# EAGLE board bmp_entropia (EAGLE 6.4)
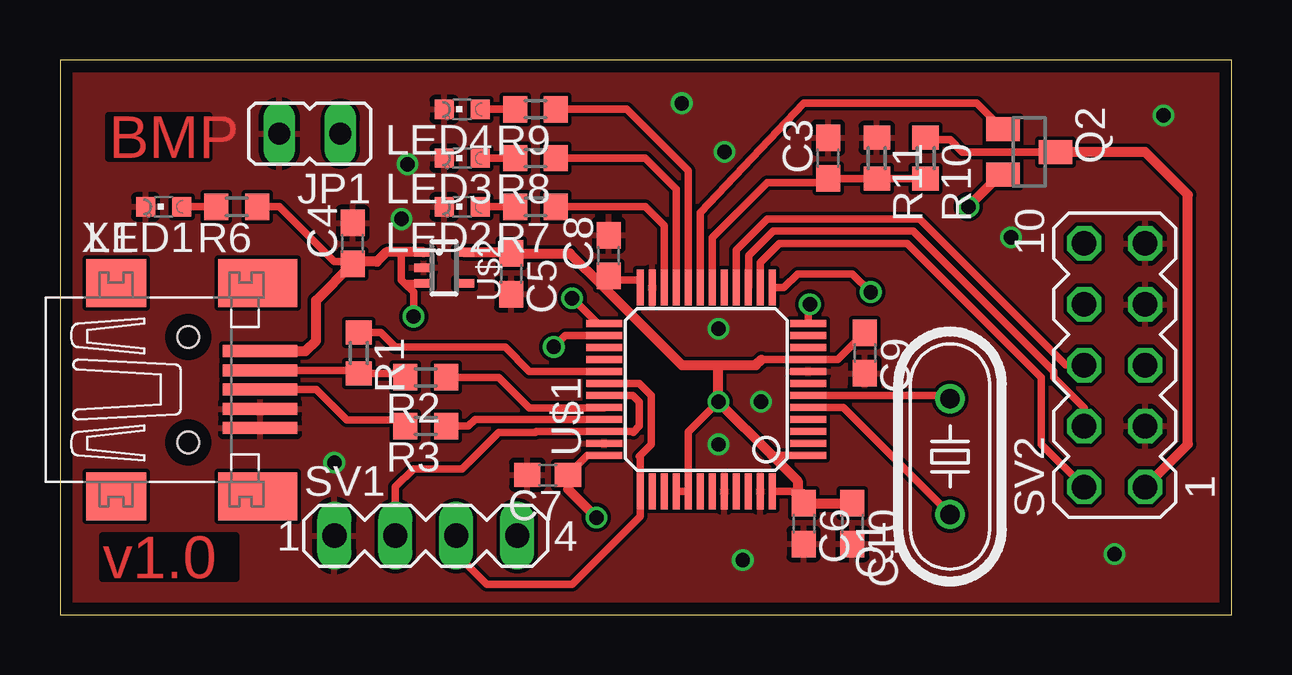
[diagram p0: board, top side]
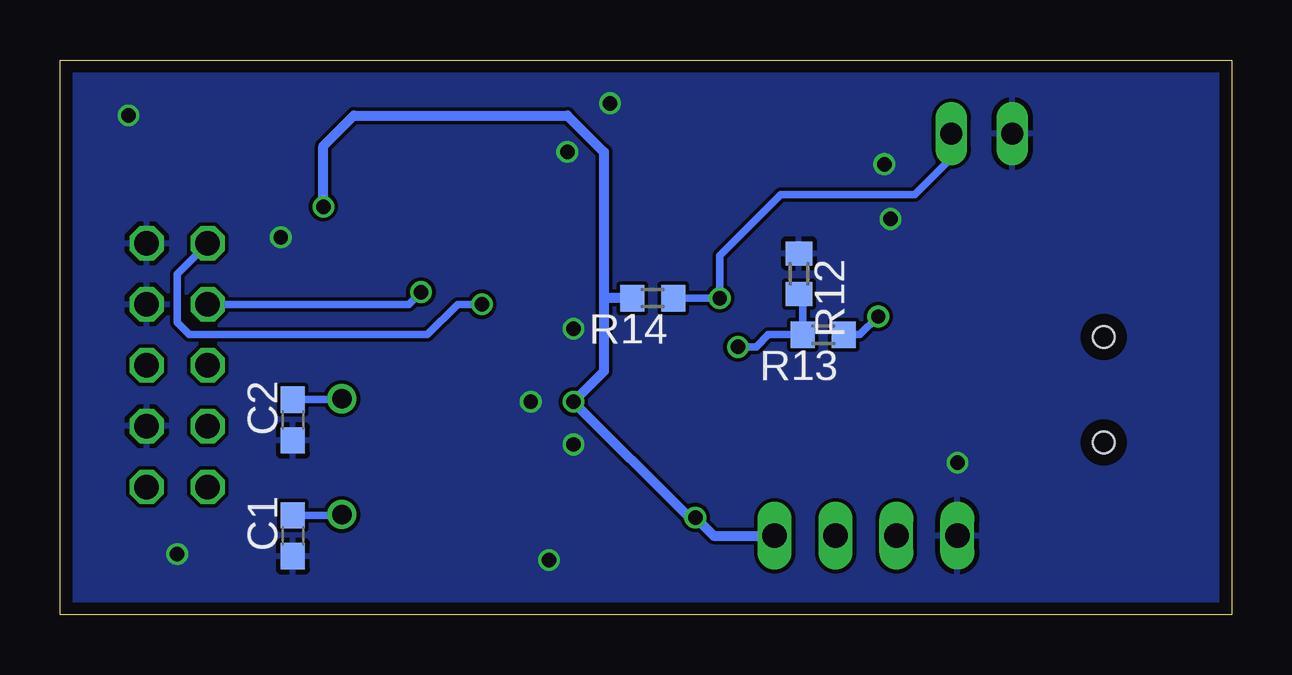
[diagram p1: board, bottom side, seen from below]

Size 48.82 x 23.14 mm. Coordinates in mm from the lower left corner, seen from the top.
Outline: 0,0 48.82,0 48.82,23.14 0,23.14 0,0
Copper layers (1*16): Top 0.035mm / dielectric 1.5mm / Bottom 0.035mm
Design rules "Eagle-DRU - 1203 - LeitOn - 01 and 02 layers": minimum track width 6mil, minimum drill 0.3mm, track to track 6mil, track to pad 6mil, pad to pad 6mil, via to via 6mil, smd to smd 6mil, copper to edge 20mil, drill to drill 10mil, minimum pad ring 8mil, minimum via ring 6mil, stop-mask expansion 3mil, vias tented up to drill 0mil, thermal gap 8mil

## Footprints (pad centres in the part's own frame; a part is rotated, then mirrored left to right if it is on the bottom)
C0603 = smd 1.1 x 1: 1 -0.85,0; 2 0.85,0
JP1 = drill 0.914 long: 1 0,-1.27; 2 0,1.27
CHIPLED_0603 = smd 0.8 x 0.8: A 0,-0.75; C 0,0.75
HC49/S = drill 0.813: 1 -2.413,0; 2 2.413,0
SOT23 = smd 1 x 1.4: 1 -0.95,-1.1; 2 0.95,-1.1; 3 0,1.1
R0603 = smd 1 x 1.1: 1 -0.85,0; 2 0.85,0
MA04-1 = drill 1.016 long: 1 -3.81,0; 2 -1.27,0; 3 1.27,0; 4 3.81,0
MA05-2 = drill 1.016 octagon: 1 -5.08,-1.27; 2 -5.08,1.27; 3 -2.54,-1.27; 4 -2.54,1.27; 5 0,-1.27; 6 0,1.27; 7 2.54,-1.27; 8 2.54,1.27; 9 5.08,-1.27; 10 5.08,1.27
TQFP48 = smd 0.3 x 1.5: 1 -2.75,-4.25; 2 -2.25,-4.25; 3 -1.75,-4.25; 4 -1.25,-4.25; 5 -0.75,-4.25; 6 -0.25,-4.25; 7 0.25,-4.25; 8 0.75,-4.25; 9 1.25,-4.25; 10 1.75,-4.25; 11 2.25,-4.25; 12 2.75,-4.25; 25 2.75,4.25; 26 2.25,4.25; 27 1.75,4.25; 28 1.25,4.25; 29 0.75,4.25; 30 0.25,4.25; 31 -0.25,4.25; 32 -0.75,4.25; 33 -1.25,4.25; 34 -1.75,4.25; 35 -2.25,4.25; 36 -2.75,4.25 | smd 1.5 x 0.3: 13 4.25,-2.75; 14 4.25,-2.25; 15 4.25,-1.75; 16 4.25,-1.25; 17 4.25,-0.75; 18 4.25,-0.25; 19 4.25,0.25; 20 4.25,0.75; 21 4.25,1.25; 22 4.25,1.75; 23 4.25,2.25; 24 4.25,2.75; 37 -4.25,2.75; 38 -4.25,2.25; 39 -4.25,1.75; 40 -4.25,1.25; 41 -4.25,0.75; 42 -4.25,0.25; 43 -4.25,-0.25; 44 -4.25,-0.75; 45 -4.25,-1.25; 46 -4.25,-1.75; 47 -4.25,-2.25; 48 -4.25,-2.75
SC70-5L = smd 0.35 x 0.8: 1 -0.65,-0.85; 2 0,-0.85; 3 0.65,-0.85; 4 0.65,0.85; 5 -0.65,0.85
32005-301 = smd 3.1 x 0.5: 1 3,1.6; 2 3,0.8; 3 3,0; 4 3,-0.8; 5 3,-1.6 | smd 2.5 x 2: M1 -3,-4.45; M2 -3,4.45 | smd 3.3 x 2: M3 2.9,4.45; M4 2.9,-4.45 | hole 0.9: 0,2.2; 0,-2.2

## Placement (x,y rotation side)
C1  27p  [C0603]  39.12,3.3 90 bottom
C2  27p  [C0603]  39.12,8.13 90 bottom
C3  100n  [C0603]  32,19.05 90 top
C4  1u  [C0603]  12.19,15.49 90 top
C5  2u2  [C0603]  18.8,14.22 270 top
C6  100n  [C0603]  30.99,3.81 270 top
C7  100n  [C0603]  20.32,5.84 180 top
C8  100n  [C0603]  22.86,14.99 90 top
C9  100n  [C0603]  33.53,10.92 270 top
C10  2u2  [C0603]  33.02,3.81 270 top
JP1  [JP1]  10.41,20.07 90 top
LED1  green  [CHIPLED_0603]  4.32,17.02 90 top
LED2  red  [CHIPLED_0603]  16.76,17.02 90 top
LED3  yellow  [CHIPLED_0603]  16.76,19.05 90 top
LED4  yellow  [CHIPLED_0603]  16.76,21.08 90 top
Q1  8MHz  [HC49/S]  37.08,6.6 90 top
Q2  IRLML5103  [SOT23]  40.39,19.3 270 top
R1  1k5  [R0603]  12.45,10.92 270 top
R2  22R  [R0603]  15.24,9.91 180 top
R3  22R  [R0603]  15.24,7.87 180 top
R6  470R  [R0603]  7.37,17.02 180 top
R7  470R  [R0603]  19.81,17.02 180 top
R8  470R  [R0603]  19.81,19.05 180 top
R9  470R  [R0603]  19.81,21.08 180 top
R10  4k7  [R0603]  36.07,19.05 270 top
R11  10k  [R0603]  34.04,19.05 270 top
R12  10k  [R0603]  18.03,14.22 270 bottom
R13  4k7  [R0603]  17.02,11.68 180 bottom
R14  10k  [R0603]  24.13,13.21 180 bottom
SV1  [MA04-1]  15.24,3.3 0 top
SV2  [MA05-2]  43.94,10.41 90 top
U$1  STM32F_48PIN  [TQFP48]  26.92,9.4 90 top
U$2  TLV70033DCK  [SC70-5L]  16,14.48 270 top
X1  MINI-USB-32005-301  [32005-301]  5.33,9.4 0 top

## Library data of the parts
C1-C10 R1-R3 R6-R14 = rcl
JP1 = jumper
LED1-LED4 = led
Q1 = crystal; OC_FARNELL: 1667008; OC_NEWARK: unknown
Q2 = transistor-small-signal
SV1 SV2 = con-lstb; OC_FARNELL: unknown; OC_NEWARK: unknown
U$1 = stm32f
U$2 = tlv700
X1 = con-cypressindustries; OC_FARNELL: unknown; OC_NEWARK: unknown

## Nets
+3V3: C5.1 C6.1 C7.1 C8.1 C9.1 C10.1 Q2.2 R14.2 SV1.4 U$1.1 U$1.9 U$1.24 U$1.36 U$1.40 U$1.41 U$1.48 U$2.5
+5V: C4.1 R6.1 R13.1 U$2.1 U$2.3 X1.1
D+: R3.2 X1.3
D-: R1.2 R2.2 X1.2
GND: C1.1 C2.1 C3.2 C4.2 C5.2 C6.2 C7.2 C8.2 C9.2 C10.2 JP1.2 LED1.C LED2.C LED3.C LED4.C R11.1 R12.1 SV1.1 SV2.3 SV2.7 SV2.9 U$1.8 U$1.23 U$1.35 U$1.44 U$1.47 U$2.2 X1.4 X1.5
LED0: R9.1 U$1.20
LED1: R8.1 U$1.21
LED2: R7.1 U$1.22
LED_G: LED1.A R6.2
LED_R: LED2.A R7.2
LED_Y0: LED4.A R9.2
LED_Y1: LED3.A R8.2
OSC_IN: C1.2 Q1.1 U$1.5
OSC_OUT: C2.2 Q1.2 U$1.6
PWR_BR: Q2.1 U$1.19
RST: SV2.10 U$1.12
RXD: SV1.2 U$1.31 U$1.34
TASTER: JP1.1 R14.1 U$1.25
TCK: SV2.4 U$1.15
TDI: SV2.8 U$1.13
TDO: SV2.6 U$1.16
TMS: SV2.2 U$1.14
TPWR: Q2.3 R10.1 SV2.1
TPWR_DETECT: C3.1 R10.2 R11.2 U$1.18
TXD: SV1.3 U$1.30 U$1.37
USB_DM: R2.1 U$1.32
USB_DP: R3.1 U$1.33
USB_ENUMERATE: R1.1 U$1.29
VBUS: R12.2 R13.2 U$1.26

## Tracks (layer width: path | path; a pad name or v marks a point on that pad's centre or on a via)
+3V3  (via drill 0.6)
  Top 0.305: 29.21,10.67 29.23,10.65 U$1.9 32.4,10.65 C9.1 | U$1.24 24.17,13.93 24.13,13.97 23.03,13.97 C8.1 | U$1.1 29.67,6.65 | U$1.48 30.5,5.15 C6.1 | U$1.40 U$1.41 26.17,7.63 v27.43,8.89 | U$1.36 21.98,6.65 C7.1
  Top 0.406: C6.1 30.99,5.04 | 22.61,13.72 21.25,15.07 C5.1 18.74,15.13 U$2.5 | 22.61,13.72 25.91,10.41 27.43,10.41 | C8.1 22.86,13.97 22.61,13.72 | 27.43,10.41 29,10.41 29.23,10.65 | 27.43,10.41 v27.43,8.89 29.67,6.65 30.73,5.59 30.73,4.91 C6.1 | Q2.2 39.18,18.35 v37.85,17.02 | C7.1 21.17,5.25 v22.35,4.06 | C6.1 C10.1
  Bottom 0.406: v37.85,17.02 37.85,19.56 36.58,20.83 27.69,20.83 26.16,19.3 26.16,13.21 | 26.16,13.21 26.16,10.16 v27.43,8.89 22.61,4.06 v22.35,4.06 21.59,3.3 SV1.4 | R14.2 26.16,13.21
+5V  (via drill 0.6)
  Top 0.305: R6.1 9.14,17.02 11.43,14.73 12.1,14.73 C4.1 12.13,14.48 | U$2.3 14.37,13.83 | 14.37,13.83 14.22,13.97 14.22,15.13 | v14.73,12.45 14.73,13.46 14.37,13.83
  Top 0.406: U$2.1 14.22,15.13 13.6,15.13 13.21,14.73 12.19,14.73 C4.1 10.67,13.12 10.67,11.43 10.24,11 X1.1
  Bottom 0.305: R13.1 15.49,11.68 v14.73,12.45
D+
  Top 0.305: X1.3 10.67,9.4 11.94,8.13 14.14,8.13 R3.2
D-
  Top 0.305: X1.2 12.32,10.2 R1.2 14.22,10.07 R2.2
GND  (via drill 0.6)
  other vias: 11.43,6.35 27.43,11.94 45.97,20.83 27.43,7.11 29.21,8.89 39.62,15.75 14.48,18.8 43.94,2.54 27.69,19.3 25.91,21.34 14.22,16.51 28.45,2.29
  pour Top: -1.27,24.38 50.04,24.38 50.04,-1.27 -1.27,-1.27
  pour Bottom: -1.27,24.38 50.04,24.38 50.04,-1.27 -1.27,-1.27
LED0
  Top 0.305: U$1.20 26.17,18.53 23.62,21.08 R9.1
LED1
  Top 0.305: U$1.21 25.67,17.76 24.38,19.05 R8.1
LED2
  Top 0.305: U$1.22 25.17,16.23 24.38,17.02 R7.1
LED_G
  Top 0.305: LED1.A R6.2
LED_R
  Top 0.305: LED2.A R7.2
LED_Y0
  Top 0.305: LED4.A R9.2
LED_Y1
  Top 0.305: LED3.A R8.2
OSC_IN
  Top 0.305: Q1.1 32.63,8.65 U$1.5
  Bottom 0.305: C1.2 37.12,4.15 Q1.1
OSC_OUT
  Top 0.305: Q1.2 36.95,9.15 U$1.6
  Bottom 0.305: C2.2 37.12,8.98 Q1.2
PWR_BR
  Top 0.305: U$1.19 26.67,16.77 30.99,21.34 38.2,21.34 Q2.1
RST  (via drill 0.6)
  Top 0.305: v31.24,12.95 31.17,12.89 U$1.12
  Bottom 0.305: v31.24,12.95 32.26,12.95 33.53,11.68 43.43,11.68 43.94,12.19 43.94,14.22 SV2.10
RXD
  Top 0.305: U$1.31 23.87,9.15 24.13,8.89 24.13,7.87 23.88,7.62 23.85,7.65 U$1.34 19.84,7.65 19.81,7.62 18.29,7.62 16.76,6.1 14.73,6.1 13.97,5.33 SV1.2
TASTER  (via drill 0.6)
  Top 0.305: U$1.25 22.4,12.15 v21.34,13.21
  Bottom 0.305: R14.1 v21.34,13.21 21.34,14.99 18.8,17.53 13.21,17.53 11.68,19.05 JP1.1
TCK
  Top 0.305: U$1.15 28.7,13.68 28.7,14.99 29.72,16 35.56,16 41.4,10.16 41.4,9.91 42.67,8.64 SV2.4
TDI  (via drill 0.6)
  Top 0.305: U$1.13 30.16,13.65 30.73,14.22 33.02,14.22 v33.78,13.46
  Bottom 0.305: v33.78,13.46 34.29,12.95 SV2.8
TDO
  Top 0.305: U$1.16 28.17,15.22 29.46,16.51 35.81,16.51 41.91,10.41 SV2.6
TMS
  Top 0.305: U$1.14 29.17,14.7 29.97,15.49 35.31,15.49 40.89,9.91 40.89,7.11 SV2.2
TPWR
  Top 0.305: Q2.3 37.59,19.3 37.08,19.81 36.16,19.81 R10.1
  Top 0.406: SV2.1 46.99,7.11 46.99,17.53 45.21,19.3 Q2.3
TPWR_DETECT
  Top 0.305: R10.2 R11.2 C3.1 31.84,18.03 29.46,18.03 27.17,15.74 U$1.18
TXD
  Top 0.305: U$1.30 24.13,9.65 24.64,9.14 24.64,7.11 24.13,6.6 24.17,6.56 U$1.37 24.17,4.11 21.34,1.27 17.78,1.27 16.51,2.54 SV1.3
USB_DM
  Top 0.305: R2.1 18.29,9.91 19.56,8.64 22.66,8.64 U$1.32
USB_DP
  Top 0.305: 16.36,8.15 R3.1 17.02,7.87 17.29,8.15 U$1.33
USB_ENUMERATE
  Top 0.305: U$1.29 19.56,10.16 18.54,11.18 13.97,11.18 13.37,11.77 R1.1
VBUS  (via drill 0.6)
  Top 0.305: U$1.26 21.05,11.65 v20.57,11.18
  Bottom 0.305: v20.57,11.18 19.81,11.18 19.3,11.68 R13.2 17.87,13.21 R12.2

## Text on the board
Top: BMP | v1.0